# Altium PCB PCB_LC_LPF_T.PcbDoc
Units mm, origin at the board's own origin, x right, y up, seen from the top; angles counter-clockwise.
Board outline 180 x 65 mm, 2 copper layers (Top Layer, Bottom Layer); 100 components, 61 nets, 200 pads, 43 vias.
Unrouted connection lines stored in the file: 5.
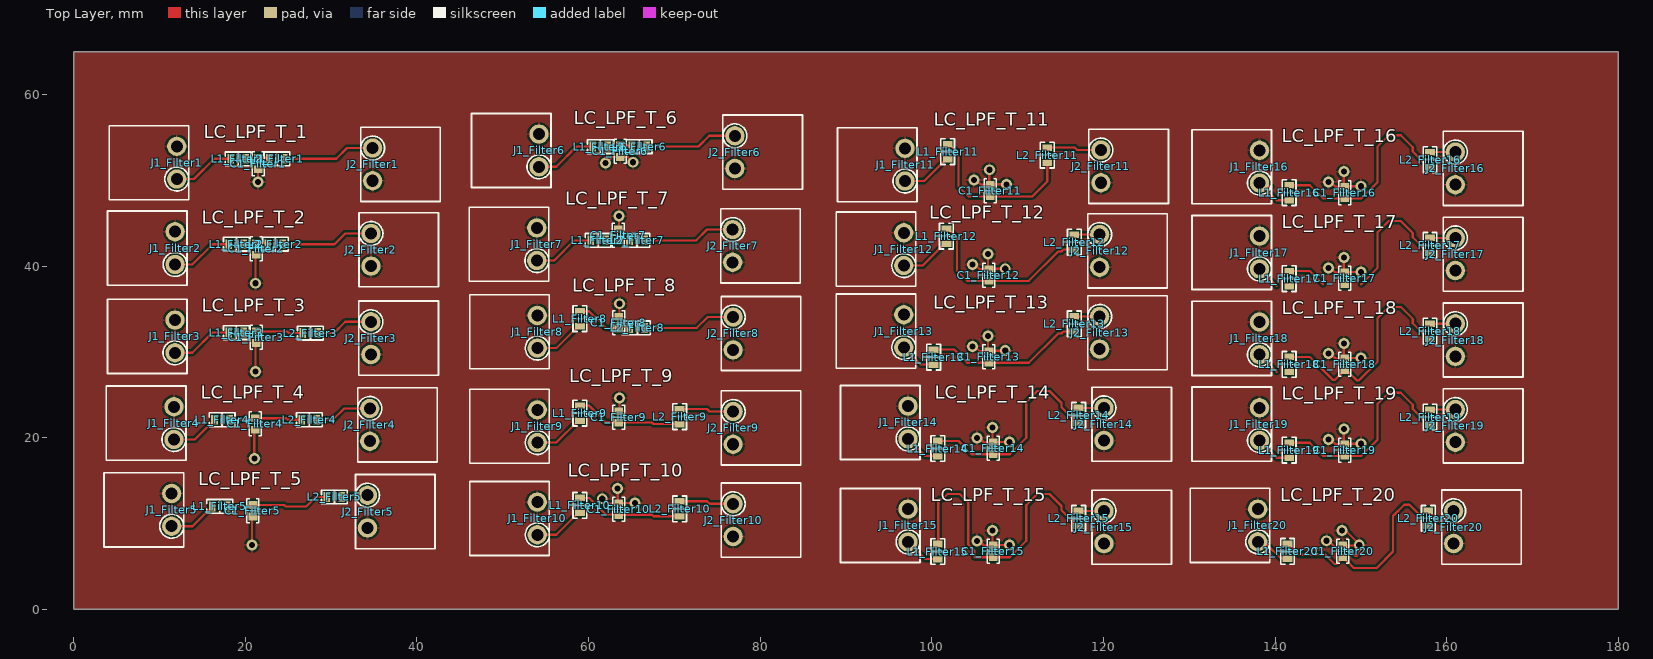
[diagram p0: Top Layer view]
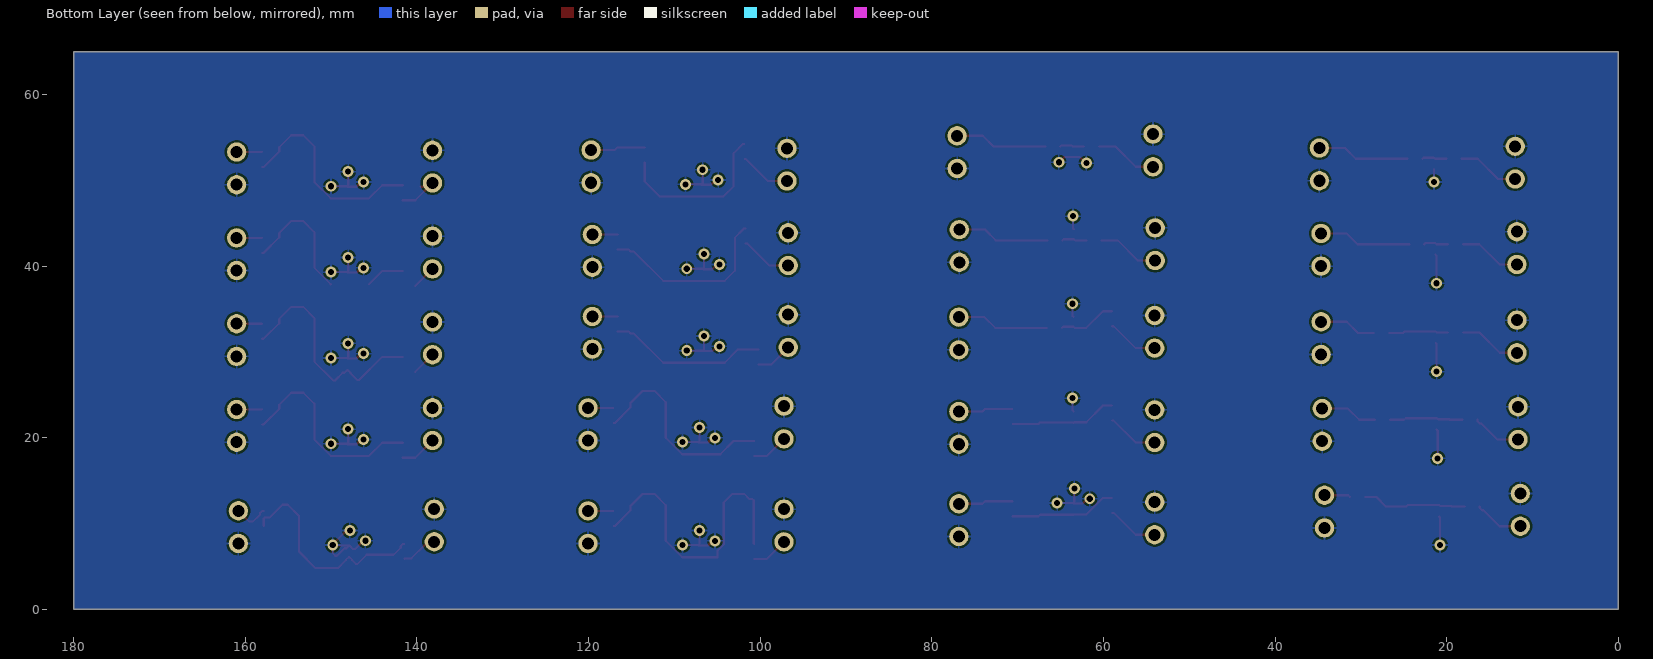
[diagram p1: Bottom Layer view, seen from below]
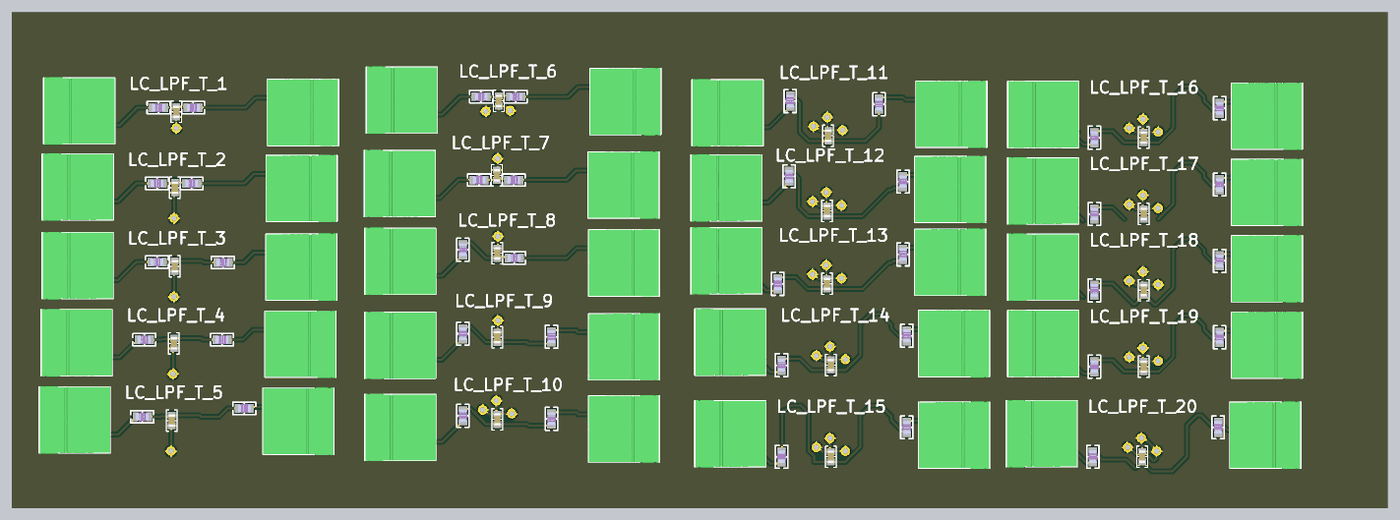
[diagram p2: 3D render of the assembled board from above, using the file's embedded part models]

## Layer stack, top to bottom
Top Solder: solder mask 0.0102, Solder Resist, Dk 3.5
Top Layer: signal copper 0.0356
Dielectric 1: dielectric 0.32, FR-4, Dk 4.8
Bottom Layer: signal copper 0.0356
Bottom Solder: solder mask 0.0102, Solder Resist, Dk 3.5

## Board outline
0,0 180,0 180,65 0,65

## Design rules (kind name [scope] priority, off if disabled: settings)
Clearance [All] p1: gap=0.254 ignorepadtopadclearanceinfootprint=FALSE except(0: Arc-Hole Track-Hole SMDPad-Hole THPad-Hole Via-Hole Fill-Hole Poly-Hole Region-Hole Text-Hole)
PolygonConnect [All] p1: connectstyle=Relief reliefconductorwidth=0.254 reliefentries=4 polygonreliefangle="90 Angle" airgapwidth=0.254
RoomDefinition Filter9 [InComponentClass('Filter9')] p1: confinementstyle=ConfineIn formatcopy=TRUE lockcomponents=TRUE outline 45.805,16.275 80.605,16.275 80.605,26.275 45.805,26.275
RoomDefinition Filter8 [InComponentClass('Filter8')] p2: confinementstyle=ConfineIn formatcopy=TRUE lockcomponents=TRUE outline 45.805,27.275 80.605,27.275 80.605,37.275 45.805,37.275
RoomDefinition Filter7 [InComponentClass('Filter7')] p3: confinementstyle=ConfineIn formatcopy=TRUE lockcomponents=TRUE outline 45.75,37.475 80.55,37.475 80.55,47.475 45.75,47.475
RoomDefinition Filter6 [InComponentClass('Filter6')] p4: confinementstyle=ConfineIn formatcopy=TRUE lockcomponents=TRUE outline 46.005,48.4 80.805,48.4 80.805,58.4 46.005,58.4
RoomDefinition Filter2 [InComponentClass('Filter2')] p5: confinementstyle=ConfineIn formatcopy=TRUE lockcomponents=FALSE outline 3.205,37.027 38.005,37.027 38.005,47.027 3.205,47.027
RoomDefinition Filter3 [InComponentClass('Filter3')] p6: confinementstyle=ConfineIn formatcopy=TRUE lockcomponents=FALSE outline 3.205,26.731 38.005,26.731 38.005,36.731 3.205,36.731
RoomDefinition Filter4 [InComponentClass('Filter4')] p7: confinementstyle=ConfineIn formatcopy=TRUE lockcomponents=FALSE outline 3.205,16.631 38.005,16.631 38.005,26.631 3.205,26.631
RoomDefinition Filter5 [InComponentClass('Filter5')] p8: confinementstyle=ConfineIn formatcopy=TRUE lockcomponents=FALSE outline 3.205,6.527 38.005,6.527 38.005,16.527 3.205,16.527
RoomDefinition Filter10 [InComponentClass('Filter10')] p9: confinementstyle=ConfineIn formatcopy=TRUE lockcomponents=TRUE outline 45.805,5.525 80.605,5.525 80.605,15.525 45.805,15.525
RoomDefinition Filter11 [InComponentClass('Filter11')] p10: confinementstyle=ConfineIn formatcopy=TRUE lockcomponents=FALSE outline 88.647,46.742 123.447,46.742 123.447,56.742 88.647,56.742
RoomDefinition Filter12 [InComponentClass('Filter12')] p11: confinementstyle=ConfineIn formatcopy=TRUE lockcomponents=FALSE outline 88.505,36.9 123.305,36.9 123.305,46.9 88.505,46.9
RoomDefinition Filter13 [InComponentClass('Filter13')] p12: confinementstyle=ConfineIn formatcopy=TRUE lockcomponents=FALSE outline 88.505,27.358 123.305,27.358 123.305,37.358 88.505,37.358
RoomDefinition Filter15 [InComponentClass('Filter15')] p13: confinementstyle=ConfineIn formatcopy=TRUE lockcomponents=FALSE outline 89.005,4.706 123.805,4.706 123.805,14.706 89.005,14.706
RoomDefinition Filter16 [InComponentClass('Filter16')] p14: confinementstyle=ConfineIn formatcopy=TRUE lockcomponents=FALSE outline 129.947,46.511 164.747,46.511 164.747,56.511 129.947,56.511
RoomDefinition Filter17 [InComponentClass('Filter17')] p15: confinementstyle=ConfineIn formatcopy=TRUE lockcomponents=FALSE outline 129.947,36.511 164.747,36.511 164.747,46.511 129.947,46.511
RoomDefinition Filter18 [InComponentClass('Filter18')] p16: confinementstyle=ConfineIn formatcopy=TRUE lockcomponents=FALSE outline 129.947,26.511 164.747,26.511 164.747,36.511 129.947,36.511
RoomDefinition Filter19 [InComponentClass('Filter19')] p17: confinementstyle=ConfineIn formatcopy=TRUE lockcomponents=FALSE outline 129.947,16.511 164.747,16.511 164.747,26.511 129.947,26.511
RoomDefinition Filter20 [InComponentClass('Filter20')] p18: confinementstyle=ConfineIn formatcopy=TRUE lockcomponents=FALSE outline 129.747,4.711 164.547,4.711 164.547,14.711 129.747,14.711
RoomDefinition Filter14 [InComponentClass('Filter14')] p19: confinementstyle=ConfineIn formatcopy=TRUE lockcomponents=FALSE outline 89.005,16.706 123.805,16.706 123.805,26.706 89.005,26.706
RoutingVias [All] p1: holewidth=0.711 width=1.27 viastyle="Through Hole" minholewidth=0.711 minwidth=1.27 maxholewidth=0.711 maxwidth=1.27
SolderMaskExpansion [All] p1: expansion=0.102 istentingtop=FALSE
Width [All] p1: maxlimit=0.254 minlimit=0.254 preferedwidth=0.254
30 further rules are at their usual default settings.

## Classes and differential pairs
channel class PCB_LC_LPF_T: Filter1 Filter2 Filter3 Filter4 Filter5 Filter6 Filter7 Filter8 Filter9 Filter10 Filter11 Filter12 Filter13 Filter14 Filter15 Filter16 Filter17 Filter18 Filter19 Filter20
component class Filter20: C1_Filter20 J1_Filter20 J2_Filter20 L1_Filter20 L2_Filter20
component class Filter19: C1_Filter19 J1_Filter19 J2_Filter19 L1_Filter19 L2_Filter19
component class Filter18: C1_Filter18 J1_Filter18 J2_Filter18 L1_Filter18 L2_Filter18
component class Filter17: C1_Filter17 J1_Filter17 J2_Filter17 L1_Filter17 L2_Filter17
component class Filter16: C1_Filter16 J1_Filter16 J2_Filter16 L1_Filter16 L2_Filter16
component class Filter15: C1_Filter15 J1_Filter15 J2_Filter15 L1_Filter15 L2_Filter15
component class Filter14: C1_Filter14 J1_Filter14 J2_Filter14 L1_Filter14 L2_Filter14
component class Filter13: C1_Filter13 J1_Filter13 J2_Filter13 L1_Filter13 L2_Filter13
component class Filter12: C1_Filter12 J1_Filter12 J2_Filter12 L1_Filter12 L2_Filter12
component class Filter11: C1_Filter11 J1_Filter11 J2_Filter11 L1_Filter11 L2_Filter11
component class Filter10: C1_Filter10 J1_Filter10 J2_Filter10 L1_Filter10 L2_Filter10
component class Filter9: C1_Filter9 J1_Filter9 J2_Filter9 L1_Filter9 L2_Filter9
component class Filter8: C1_Filter8 J1_Filter8 J2_Filter8 L1_Filter8 L2_Filter8
component class Filter7: C1_Filter7 J1_Filter7 J2_Filter7 L1_Filter7 L2_Filter7
component class Filter6: C1_Filter6 J1_Filter6 J2_Filter6 L1_Filter6 L2_Filter6
component class Filter5: C1_Filter5 J1_Filter5 J2_Filter5 L1_Filter5 L2_Filter5
component class Filter4: C1_Filter4 J1_Filter4 J2_Filter4 L1_Filter4 L2_Filter4
component class Filter3: C1_Filter3 J1_Filter3 J2_Filter3 L1_Filter3 L2_Filter3
component class Filter2: C1_Filter2 J1_Filter2 J2_Filter2 L1_Filter2 L2_Filter2
component class Filter1: C1_Filter1 J1_Filter1 J2_Filter1 L1_Filter1 L2_Filter1

## Components (designator, comment, footprint, x,y, rotation, side; value= is the part's Value field where it differs from the comment)
C1_Filter1 "10 µF" "CAP 0603_1608" 21.5,51.95 r90 top (schematic designator C1)
C1_Filter2 "10 µF" "CAP 0603_1608" 21.305,42.002 r90 top (schematic designator C1)
C1_Filter3 "10 µF" "CAP 0603_1608" 21.293,31.706 r90 top (schematic designator C1)
C1_Filter4 "10 µF" "CAP 0603_1608" 21.168,21.606 r90 top (schematic designator C1)
C1_Filter5 "10 µF" "CAP 0603_1608" 20.905,11.502 r90 top (schematic designator C1)
C1_Filter6 "10 µF" "CAP 0603_1608" 63.705,53.375 r90 top (schematic designator C1)
C1_Filter7 "10 µF" "CAP 0603_1608" 63.445,43.617 r270 top (schematic designator C1)
C1_Filter8 "10 µF" "CAP 0603_1608" 63.5,33.417 r270 top (schematic designator C1)
C1_Filter9 "10 µF" "CAP 0603_1608" 63.5,22.417 r270 top (schematic designator C1)
C1_Filter10 "10 µF" "CAP 0603_1608" 63.5,11.667 r270 top (schematic designator C1)
C1_Filter11 "10 µF" "CAP 0603_1608" 106.8,48.8 r270 top (schematic designator C1)
C1_Filter12 "10 µF" "CAP 0603_1608" 106.658,38.958 r270 top (schematic designator C1)
C1_Filter13 "10 µF" "CAP 0603_1608" 106.658,29.416 r270 top (schematic designator C1)
C1_Filter14 "10 µF" "CAP 0603_1608" 107.158,18.764 r270 top (schematic designator C1)
C1_Filter15 "10 µF" "CAP 0603_1608" 107.158,6.764 r270 top (schematic designator C1)
C1_Filter16 "10 µF" "CAP 0603_1608" 148.1,48.569 r270 top (schematic designator C1)
C1_Filter17 "10 µF" "CAP 0603_1608" 148.1,38.569 r270 top (schematic designator C1)
C1_Filter18 "10 µF" "CAP 0603_1608" 148.1,28.569 r270 top (schematic designator C1)
C1_Filter19 "10 µF" "CAP 0603_1608" 148.1,18.569 r270 top (schematic designator C1)
C1_Filter20 "10 µF" "CAP 0603_1608" 147.9,6.769 r270 top (schematic designator C1)
J1_Filter1 "OQ0232510000G" "FCI 06-381-2PIN" 8.726,52.049 r90 top (schematic designator J1)
J1_Filter2 "OQ0232510000G" "FCI 06-381-2PIN" 8.531,42.101 r90 top (schematic designator J1)
J1_Filter3 "OQ0232510000G" "FCI 06-381-2PIN" 8.519,31.805 r90 top (schematic designator J1)
J1_Filter4 "OQ0232510000G" "FCI 06-381-2PIN" 8.394,21.705 r90 top (schematic designator J1)
J1_Filter5 "OQ0232510000G" "FCI 06-381-2PIN" 8.131,11.601 r90 top (schematic designator J1)
J1_Filter6 "OQ0232510000G" "FCI 06-381-2PIN" 50.931,53.474 r90 top (schematic designator J1)
J1_Filter7 "OQ0232510000G" "FCI 06-381-2PIN" 50.676,42.549 r90 top (schematic designator J1)
J1_Filter8 "OQ0232510000G" "FCI 06-381-2PIN" 50.731,32.349 r90 top (schematic designator J1)
J1_Filter9 "OQ0232510000G" "FCI 06-381-2PIN" 50.731,21.349 r90 top (schematic designator J1)
J1_Filter10 "OQ0232510000G" "FCI 06-381-2PIN" 50.731,10.599 r90 top (schematic designator J1)
J1_Filter11 "OQ0232510000G" "FCI 06-381-2PIN" 93.573,51.816 r90 top (schematic designator J1)
J1_Filter12 "OQ0232510000G" "FCI 06-381-2PIN" 93.431,41.974 r90 top (schematic designator J1)
J1_Filter13 "OQ0232510000G" "FCI 06-381-2PIN" 93.431,32.432 r90 top (schematic designator J1)
J1_Filter14 "OQ0232510000G" "FCI 06-381-2PIN" 93.931,21.78 r90 top (schematic designator J1)
J1_Filter15 "OQ0232510000G" "FCI 06-381-2PIN" 93.931,9.78 r90 top (schematic designator J1)
J1_Filter16 "OQ0232510000G" "FCI 06-381-2PIN" 134.873,51.585 r90 top (schematic designator J1)
J1_Filter17 "OQ0232510000G" "FCI 06-381-2PIN" 134.873,41.585 r90 top (schematic designator J1)
J1_Filter18 "OQ0232510000G" "FCI 06-381-2PIN" 134.873,31.585 r90 top (schematic designator J1)
J1_Filter19 "OQ0232510000G" "FCI 06-381-2PIN" 134.873,21.585 r90 top (schematic designator J1)
J1_Filter20 "OQ0232510000G" "FCI 06-381-2PIN" 134.673,9.785 r90 top (schematic designator J1)
J2_Filter1 "OQ0232510000G" "FCI 06-381-2PIN" 38.15,51.85 r270 top (schematic designator J2)
J2_Filter2 "OQ0232510000G" "FCI 06-381-2PIN" 37.955,41.902 r270 top (schematic designator J2)
J2_Filter3 "OQ0232510000G" "FCI 06-381-2PIN" 37.943,31.606 r270 top (schematic designator J2)
J2_Filter4 "OQ0232510000G" "FCI 06-381-2PIN" 37.818,21.506 r270 top (schematic designator J2)
J2_Filter5 "OQ0232510000G" "FCI 06-381-2PIN" 37.555,11.402 r270 top (schematic designator J2)
J2_Filter6 "OQ0232510000G" "FCI 06-381-2PIN" 80.355,53.275 r270 top (schematic designator J2)
J2_Filter7 "OQ0232510000G" "FCI 06-381-2PIN" 80.1,42.35 r270 top (schematic designator J2)
J2_Filter8 "OQ0232510000G" "FCI 06-381-2PIN" 80.155,32.15 r270 top (schematic designator J2)
J2_Filter9 "OQ0232510000G" "FCI 06-381-2PIN" 80.155,21.15 r270 top (schematic designator J2)
J2_Filter10 "OQ0232510000G" "FCI 06-381-2PIN" 80.155,10.4 r270 top (schematic designator J2)
J2_Filter11 "OQ0232510000G" "FCI 06-381-2PIN" 122.997,51.617 r270 top (schematic designator J2)
J2_Filter12 "OQ0232510000G" "FCI 06-381-2PIN" 122.855,41.775 r270 top (schematic designator J2)
J2_Filter13 "OQ0232510000G" "FCI 06-381-2PIN" 122.855,32.233 r270 top (schematic designator J2)
J2_Filter14 "OQ0232510000G" "FCI 06-381-2PIN" 123.355,21.581 r270 top (schematic designator J2)
J2_Filter15 "OQ0232510000G" "FCI 06-381-2PIN" 123.355,9.581 r270 top (schematic designator J2)
J2_Filter16 "OQ0232510000G" "FCI 06-381-2PIN" 164.297,51.386 r270 top (schematic designator J2)
J2_Filter17 "OQ0232510000G" "FCI 06-381-2PIN" 164.297,41.386 r270 top (schematic designator J2)
J2_Filter18 "OQ0232510000G" "FCI 06-381-2PIN" 164.297,31.386 r270 top (schematic designator J2)
J2_Filter19 "OQ0232510000G" "FCI 06-381-2PIN" 164.297,21.386 r270 top (schematic designator J2)
J2_Filter20 "OQ0232510000G" "FCI 06-381-2PIN" 164.097,9.586 r270 top (schematic designator J2)
L1_Filter1 "47µH" "IND 0603_1608 RF WW" 19.175,52.5 r180 top (schematic designator L1)
L1_Filter2 "47µH" "IND 0603_1608 RF WW" 18.98,42.552 r180 top (schematic designator L1)
L1_Filter3 "47µH" "IND 0603_1608 RF WW" 18.968,32.256 r180 top (schematic designator L1)
L1_Filter4 "47µH" "IND 0603_1608 RF WW" 17.3,22.1 r180 top (schematic designator L1)
L1_Filter5 "47µH" "IND 0603_1608 RF WW" 17.037,11.996 r180 top (schematic designator L1)
L1_Filter6 "47µH" "IND 0603_1608 RF WW" 61.38,53.925 r180 top (schematic designator L1)
L1_Filter7 "47µH" "IND 0603_1608 RF WW" 61.125,43 r180 top (schematic designator L1)
L1_Filter8 "47µH" "IND 0603_1608 RF WW" 59,33.875 r270 top (schematic designator L1)
L1_Filter9 "47µH" "IND 0603_1608 RF WW" 59,22.875 r270 top (schematic designator L1)
L1_Filter10 "47µH" "IND 0603_1608 RF WW" 59,12.125 r270 top (schematic designator L1)
L1_Filter11 "47µH" "IND 0603_1608 RF WW" 101.842,53.342 r270 top (schematic designator L1)
L1_Filter12 "47µH" "IND 0603_1608 RF WW" 101.7,43.5 r270 top (schematic designator L1)
L1_Filter13 "47µH" "IND 0603_1608 RF WW" 100.2,29.4 r270 top (schematic designator L1)
L1_Filter14 "47µH" "IND 0603_1608 RF WW" 100.7,18.748 r270 top (schematic designator L1)
L1_Filter15 "47µH" "IND 0603_1608 RF WW" 100.7,6.748 r270 top (schematic designator L1)
L1_Filter16 "47µH" "IND 0603_1608 RF WW" 141.642,48.553 r270 top (schematic designator L1)
L1_Filter17 "47µH" "IND 0603_1608 RF WW" 141.642,38.553 r270 top (schematic designator L1)
L1_Filter18 "47µH" "IND 0603_1608 RF WW" 141.642,28.553 r270 top (schematic designator L1)
L1_Filter19 "47µH" "IND 0603_1608 RF WW" 141.642,18.553 r270 top (schematic designator L1)
L1_Filter20 "47µH" "IND 0603_1608 RF WW" 141.442,6.753 r270 top (schematic designator L1)
L2_Filter1 "47µH" "IND 0603_1608 RF WW" 23.7,52.5 r180 top (schematic designator L2)
L2_Filter2 "47µH" "IND 0603_1608 RF WW" 23.505,42.552 r180 top (schematic designator L2)
L2_Filter3 "47µH" "IND 0603_1608 RF WW" 27.6,32.2 r180 top (schematic designator L2)
L2_Filter4 "47µH" "IND 0603_1608 RF WW" 27.475,22.1 r180 top (schematic designator L2)
L2_Filter5 "47µH" "IND 0603_1608 RF WW" 30.4,13.1 r180 top (schematic designator L2)
L2_Filter6 "47µH" "IND 0603_1608 RF WW" 65.905,53.925 r180 top (schematic designator L2)
L2_Filter7 "47µH" "IND 0603_1608 RF WW" 65.65,43 r180 top (schematic designator L2)
L2_Filter8 "47µH" "IND 0603_1608 RF WW" 65.705,32.8 r180 top (schematic designator L2)
L2_Filter9 "47µH" "IND 0603_1608 RF WW" 70.605,22.475 r270 top (schematic designator L2)
L2_Filter10 "47µH" "IND 0603_1608 RF WW" 70.605,11.725 r270 top (schematic designator L2)
L2_Filter11 "47µH" "IND 0603_1608 RF WW" 113.447,52.942 r270 top (schematic designator L2)
L2_Filter12 "47µH" "IND 0603_1608 RF WW" 116.6,42.8 r270 top (schematic designator L2)
L2_Filter13 "47µH" "IND 0603_1608 RF WW" 116.6,33.258 r270 top (schematic designator L2)
L2_Filter14 "47µH" "IND 0603_1608 RF WW" 117.1,22.606 r270 top (schematic designator L2)
L2_Filter15 "47µH" "IND 0603_1608 RF WW" 117.1,10.606 r270 top (schematic designator L2)
L2_Filter16 "47µH" "IND 0603_1608 RF WW" 158.042,52.411 r270 top (schematic designator L2)
L2_Filter17 "47µH" "IND 0603_1608 RF WW" 158.042,42.411 r270 top (schematic designator L2)
L2_Filter18 "47µH" "IND 0603_1608 RF WW" 158.042,32.411 r270 top (schematic designator L2)
L2_Filter19 "47µH" "IND 0603_1608 RF WW" 158.042,22.411 r270 top (schematic designator L2)
L2_Filter20 "47µH" "IND 0603_1608 RF WW" 157.842,10.611 r270 top (schematic designator L2)

## Footprints (in the part's own frame and the unit in brackets; to place one, negate y for a bottom-side part, rotate by r counter-clockwise, add the part's x,y. Pads: shape width x height; smd on the part's side, far side on the other; paste and mask are expansions set on the pad)
"CAP 0603_1608" [mm] "Chip Capacitor, 2-Leads, Body 1.60x0.80mm, IPC Medium Density"
  rect 0.9x1 smd: 1(-0.675,0) 2(0.675,0)
  silkscreen extent -1.4,-0.7 1.4,0.7, body extent -0.8,-0.41 0.8,0.41, height 0.82
"FCI 06-381-2PIN" [mm] "FCI Pluggable Terminal Block"
  round 2.25 hole 1.4: 1(-1.905,-3.302) 2(1.905,-3.302)
  silkscreen extent -4.32,-4.7 4.32,4.57, body extent -4.4,-4.7 4.4,4.5, height 7.6
"IND 0603_1608 RF WW" [mm] "Chip Inductor, 2-Leads, Body 1.65x0.99mm, IPC Medium Density"
  rect 0.76x1.13 smd: 1(-0.875,0) 2(0.875,0)
  silkscreen extent -1.5,-0.8 1.5,0.8, body extent -0.84,-0.58 0.83,0.58, height 1

## Part data
C1_Filter1 C1_Filter2 C1_Filter3 C1_Filter4 C1_Filter5 C1_Filter6 C1_Filter7 C1_Filter8 C1_Filter9 C1_Filter10 C1_Filter11 C1_Filter12 C1_Filter13 C1_Filter14 C1_Filter15 C1_Filter16 C1_Filter17 C1_Filter18 C1_Filter19 C1_Filter20: library part MD0603BW106M100NHT-EM, "CAP CER 10UF 10V X5R 0603", Device Package="0603 (1608 Metric)", manufacturer="Knowles Novacap", Operating Temperature="-55°C ~ 85°C", Supplier Part Number 1=1763-MD0603BW106M100NHT-EMCT-ND, Temperature Coefficient=X5R, Tolerance=±20%, Voltage - Rated=10V, Applications="Medical, Non-Critical", Capacitance="10 µF", componentlink1description=Datasheet, componentlink1url="https://mm.digikey.com/Volume0/opasdata/d220001/medias/docus/5546/MD Series R3.pdf", componentlink2description="DigiKey Link", componentlink2url=https://www.digikey.com/en/products/detail/knowles-novacap/MD0603BW106M100NHT-EM/21406876, lastupdated="02/11/2023 19:09:18", Lifecycle Status=Active, Minimum Order=1, Mounting Type="Surface Mount, MLCC", Package / Case="0603 (1608 Metric)", packaging=TapeAndReel, Part Number=MD0603BW106M100NHT-EM, partid=56748, price=0.24, series=MD, Supplier 1=DigiKey
J1_Filter1 J1_Filter2 J1_Filter3 J1_Filter4 J1_Filter5 J1_Filter6 J1_Filter7 J1_Filter8 J1_Filter9 J1_Filter10 J1_Filter11 J1_Filter12 J1_Filter13 J1_Filter14 J1_Filter15 J1_Filter16 J1_Filter17 J1_Filter18 J1_Filter19 J1_Filter20 J2_Filter1 J2_Filter2 J2_Filter3 J2_Filter4 J2_Filter5 J2_Filter6 J2_Filter7 J2_Filter8 J2_Filter9 J2_Filter10 J2_Filter11 J2_Filter12 J2_Filter13 J2_Filter14 J2_Filter15 J2_Filter16 J2_Filter17 J2_Filter18 J2_Filter19 J2_Filter20: "TERM BLOCK HDR 2POS 90DEG 3.81MM", Color=Green, Current - UL=10A, manufacturer="Amphenol Anytek", Operating Temperature="-40°C ~ 115°C", Supplier Part Number 1=609-3819-ND, Voltage - UL=300V, componentlink1description=Datasheet, componentlink1url=http://portal.fciconnect.com/Comergent//fci/drawing/oqxx32x100j0g.pdf, componentlink2description="DigiKey Link", componentlink2url=//digikey.com/product-detail/en/amphenol-anytek/OQ0232510000G/609-3819-ND/2261255, Contact Mating Finish=Tin, Header Orientation="90°, Right Angle", lastupdated="16/12/2019 19:14:30", Lifecycle Status=0, Minimum Order=1, Mounting Type="Through Hole", Number of Levels=1, Number of Positions=2, packaging=Bulk, Part Number=OQ0232510000G, Part Status=Active, Pitch="0.150\" (3.81mm)", Positions Per Level=2, price=0.49, series=06-381, Supplier 1=DigiKey, Termination Style=Solder, Type="Header, Male Pins, Shrouded (4 Side)"
L1_Filter1 L1_Filter2 L1_Filter3 L1_Filter4 L1_Filter5 L1_Filter6 L1_Filter7 L1_Filter8 L1_Filter9 L1_Filter10 L1_Filter11 L1_Filter12 L1_Filter13 L1_Filter14 L1_Filter15 L1_Filter16 L1_Filter17 L1_Filter18 L1_Filter19 L1_Filter20 L2_Filter1 L2_Filter2 L2_Filter3 L2_Filter4 L2_Filter5 L2_Filter6 L2_Filter7 L2_Filter8 L2_Filter9 L2_Filter10 L2_Filter11 L2_Filter12 L2_Filter13 L2_Filter14 L2_Filter15 L2_Filter16 L2_Filter17 L2_Filter18 L2_Filter19 L2_Filter20: library part L0603B470MPWFT, "INDUCTORPOWER LINE 0603 47H 20%", Current Rating (Amps)=90mA, DC Resistance (DCR)=5.8Ohm, Device Package="0603 (1608 Metric)", Frequency - Self Resonant=11MHz, Inductance Frequency - Test=2.52MHz, manufacturer=KEMET, Operating Temperature="-40°C ~ 105°C", Supplier Part Number 1=399-17776-1-ND, Tolerance=±20%, componentlink1description=Datasheet, componentlink1url=https://api.kemet.com/component-edge/download/datasheet/L0603B470MPWFT.pdf, componentlink2description="DigiKey Link", componentlink2url=http://digikey.com/product-detail/en/kemet/L0603B470MPWFT/399-17776-1-ND/8601439, Height - Seated (Max)="0.035\" (0.90mm)", Inductance=47µH, lastupdated="06/09/2020 11:05:20", Lifecycle Status=Active, Material - Core=Ferrite, Minimum Order=1, Mounting Type="Surface Mount", Package / Case="0603 (1608 Metric)", packaging=TapeAndReel, Part Number=L0603B470MPWFT, Part Status=Active, partid=1309, price=0.14, series=L-PWF, Shielding=Unshielded, Size / Dimension="0.063\" L x 0.031\" W (1.60mm x 0.80mm)", Supplier 1=DigiKey, Supplier Device Package="0603 (1608 Metric)", Type=Wirewound

## Via types
v1: diameter 1.27, hole 0.711, Top Layer to Bottom Layer, 43 vias

## Nets (pads, with @x,y where several pads share a name; then routed paths per layer and width w, separated by ;. In a path a pad name is that pad's centre, name@x,y a point inside that pad or via, vN(x,y) a via of type N, cw(c..) or ccw(c..) an arc to the next point about the centre after c; other vN are vias at no path point)
GND: C1_Filter1.1 C1_Filter2.1 C1_Filter3.1 C1_Filter4.1 C1_Filter5.1 C1_Filter6.1 C1_Filter7.1 C1_Filter8.1 C1_Filter9.1 C1_Filter10.1 C1_Filter11.1 C1_Filter12.1 C1_Filter13.1 C1_Filter14.1 C1_Filter15.1 C1_Filter16.1 C1_Filter17.1 C1_Filter18.1 C1_Filter19.1 C1_Filter20.1 J1_Filter1.2 J1_Filter2.2 J1_Filter3.2 J1_Filter4.2 J1_Filter5.2 J1_Filter6.2 J1_Filter7.2 J1_Filter8.2 J1_Filter9.2 J1_Filter10.2 J1_Filter11.2 J1_Filter12.2 J1_Filter13.2 J1_Filter14.2 J1_Filter15.2 J1_Filter16.2 J1_Filter17.2 J1_Filter18.2 J1_Filter19.2 J1_Filter20.2 J2_Filter1.2 J2_Filter2.2 J2_Filter3.2 J2_Filter4.2 J2_Filter5.2 J2_Filter6.2 J2_Filter7.2 J2_Filter8.2 J2_Filter9.2 J2_Filter10.2 J2_Filter11.2 J2_Filter12.2 J2_Filter13.2 J2_Filter14.2 J2_Filter15.2 J2_Filter16.2 J2_Filter17.2 J2_Filter18.2 J2_Filter19.2 J2_Filter20.2 | length 93.2
  Top Layer w0.254: v1(20.8,7.5) 20.8,10.722 C1_Filter5.1 ; v1(21.063,17.604) 21.063,20.826 C1_Filter4.1 ; v1(21.188,27.704) 21.188,30.926 C1_Filter3.1 ; v1(21.2,38) 21.2,41.222 C1_Filter2.1 ; v1(21.5,49.8) C1_Filter1.1 ; v1(61.6,12.898) 61.875,12.898 62.431,12.342 C1_Filter10.1 ; v1(62,52) 62.037,52 62.737,52.7 C1_Filter6.1 64.586,52.7 65.186,52.1 v1(65.2,52.1) ; v1(63.4,14.098) 63.4,12.442 C1_Filter10.1 ; C1_Filter7.1 63.545,44.392 v1(63.545,45.817) ; C1_Filter9.1 63.6,23.192 v1(63.6,24.617) ; C1_Filter8.1 63.6,34.192 v1(63.6,35.617) ; v1(65.4,12.398) 63.556,12.398 C1_Filter10.1 ; v1(104.758,30.647) 105.033,30.647 105.589,30.091 C1_Filter13.1 ; v1(104.758,40.189) 105.033,40.189 105.589,39.633 C1_Filter12.1 ; v1(104.9,50.031) 105.175,50.031 105.731,49.475 C1_Filter11.1 ; v1(105.258,7.995) 105.533,7.995 106.089,7.439 C1_Filter15.1 ; v1(105.258,19.995) 105.533,19.995 106.089,19.439 C1_Filter14.1 ; C1_Filter13.1@106.558,30.091 C1_Filter13.1 ; v1(106.558,31.847) 106.558,30.191 C1_Filter13.1 ; C1_Filter12.1@106.558,39.633 C1_Filter12.1 ; v1(106.558,41.389) 106.558,39.733 C1_Filter12.1 ; C1_Filter11.1@106.7,49.475 C1_Filter11.1 ; v1(106.7,51.231) 106.7,49.575 C1_Filter11.1 ; C1_Filter15.1@107.058,7.439 C1_Filter15.1 ; v1(107.058,9.195) 107.058,7.539 C1_Filter15.1 ; C1_Filter14.1@107.058,19.439 C1_Filter14.1 ; v1(107.058,21.195) 107.058,19.539 C1_Filter14.1 ; v1(108.558,30.147) 106.714,30.147 C1_Filter13.1 ; v1(108.558,39.689) 106.714,39.689 C1_Filter12.1 ; v1(108.7,49.531) 106.856,49.531 C1_Filter11.1 ; v1(109.058,7.495) 107.214,7.495 C1_Filter15.1 ; v1(109.058,19.495) 107.214,19.495 C1_Filter14.1 ; v1(146,8) 146.214,8 147.168,7.046 147.452,7.046 147.85,7.444 C1_Filter20.1 148.223,7.121 148.437,7.121 149.295,6.263 149.506,6.263 149.8,6.557 v1(149.8,7.5) ; v1(146.2,19.8) 146.475,19.8 147.031,19.244 C1_Filter19.1 ; v1(146.2,29.8) 146.475,29.8 147.031,29.244 C1_Filter18.1 ; v1(146.2,39.8) 146.475,39.8 147.031,39.244 C1_Filter17.1 ; v1(146.2,49.8) 146.475,49.8 147.031,49.244 C1_Filter16.1 ; v1(147.8,9.2) 147.994,9.006 148.4,9.006 149.799,7.607 149.799,7.547 149.696,7.444 C1_Filter20.1@148.114,7.444 ; C1_Filter19.1@148,19.244 C1_Filter19.1 ; v1(148,21) 148,19.344 C1_Filter19.1 ; C1_Filter18.1@148,29.244 C1_Filter18.1 ; v1(148,31) 148,29.344 C1_Filter18.1 ; C1_Filter17.1@148,39.244 C1_Filter17.1 ; v1(148,41) 148,39.344 C1_Filter17.1 ; C1_Filter16.1@148,49.244 C1_Filter16.1 ; v1(148,51) 148,49.344 C1_Filter16.1 ; v1(150,19.3) 148.156,19.3 C1_Filter19.1 ; v1(150,29.3) 148.156,29.3 C1_Filter18.1 ; v1(150,39.3) 148.156,39.3 C1_Filter17.1 ; v1(150,49.3) 148.156,49.3 C1_Filter16.1
IN_Filter1: J1_Filter1.1 L1_Filter1.2 | length 7.2
  Top Layer w0.254: J1_Filter1.1 14.044,50.144 16.4,52.5 L1_Filter1.2
IN_Filter2: J1_Filter2.1 L1_Filter2.2 | length 7.2
  Top Layer w0.254: J1_Filter2.1 13.849,40.196 16.205,42.552 L1_Filter2.2
IN_Filter3: J1_Filter3.1 L1_Filter3.2 | length 7.2
  Top Layer w0.254: J1_Filter3.1 13.837,29.9 16.193,32.256 L1_Filter3.2
IN_Filter4: J1_Filter4.1 L1_Filter4.2 | length 5.8
  Top Layer w0.254: J1_Filter4.1 14.125,19.8 15.987,21.662 16.172,21.662 16.425,21.915 L1_Filter4.2
IN_Filter5: J1_Filter5.1 L1_Filter5.2 | length 5.8
  Top Layer w0.254: J1_Filter5.1 13.862,9.696 15.724,11.558 15.909,11.558 16.162,11.811 L1_Filter5.2
IN_Filter6: J1_Filter6.1 L1_Filter6.2 | length 7.2
  Top Layer w0.254: J1_Filter6.1 56.249,51.569 58.605,53.925 L1_Filter6.2
IN_Filter7: J1_Filter7.1 L1_Filter7.2 | length 7.2
  Top Layer w0.254: J1_Filter7.1 55.994,40.644 58.35,43 L1_Filter7.2
IN_Filter8: J1_Filter8.1 L1_Filter8.2 | length 6
  Top Layer w0.254: J1_Filter8.1 56.259,30.444 58.815,33 L1_Filter8.2
IN_Filter9: J1_Filter9.1 L1_Filter9.2 | length 6
  Top Layer w0.254: J1_Filter9.1 56.259,19.444 58.815,22 L1_Filter9.2
IN_Filter10: J1_Filter10.1 L1_Filter10.2 | length 6
  Top Layer w0.254: J1_Filter10.1 56.259,8.694 58.815,11.25 L1_Filter10.2
IN_Filter11: J1_Filter11.1 L1_Filter11.2 | length 6
  Top Layer w0.254: J1_Filter11.1 99.101,49.911 101.657,52.467 L1_Filter11.2
IN_Filter12: J1_Filter12.1 L1_Filter12.2 | length 6
  Top Layer w0.254: J1_Filter12.1 98.959,40.069 101.515,42.625 L1_Filter12.2
IN_Filter13: J1_Filter13.1 L1_Filter13.2 | length 4.3
  Top Layer w0.254: J1_Filter13.1 98.735,28.525 L1_Filter13.2
IN_Filter14: J1_Filter14.1 L1_Filter14.2 | length 4.3
  Top Layer w0.254: J1_Filter14.1 99.235,17.873 L1_Filter14.2
IN_Filter15: J1_Filter15.1 L1_Filter15.2 | length 4.3
  Top Layer w0.254: J1_Filter15.1 99.235,5.873 L1_Filter15.2
IN_Filter16: J1_Filter16.1 L1_Filter16.2 | length 4.3
  Top Layer w0.254: J1_Filter16.1 140.177,47.678 L1_Filter16.2
IN_Filter17: J1_Filter17.1 L1_Filter17.2 | length 2.8
  Top Layer w0.254: J1_Filter17.1 140.177,37.678
IN_Filter18: J1_Filter18.1 L1_Filter18.2 | length 4.3
  Top Layer w0.254: 138.077,49.253 139.542,49.253 ; J1_Filter18.1 140.177,27.678
IN_Filter19: J1_Filter19.1 L1_Filter19.2 | length 4.3
  Top Layer w0.254: J1_Filter19.1 140.177,17.678 L1_Filter19.2
IN_Filter20: J1_Filter20.1 L1_Filter20.2 | length 4.3
  Top Layer w0.254: J1_Filter20.1 138.357,7.498 139.093,7.498 140.645,5.947 141.373,5.947 L1_Filter20.2
NetC1_Filter1_2: C1_Filter1.2 L1_Filter1.1 L2_Filter1.2 | length 2.9
  Top Layer w0.254: L1_Filter1.1 21.375,52.5 C1_Filter1.2 22.7,52.625 L2_Filter1.2
NetC1_Filter2_2: C1_Filter2.2 L1_Filter2.1 L2_Filter2.2 | length 2.9
  Top Layer w0.254: L1_Filter2.1 21.18,42.552 C1_Filter2.2 22.505,42.677 L2_Filter2.2
NetC1_Filter3_2: C1_Filter3.2 L1_Filter3.1 L2_Filter3.2 | length 7
  Top Layer w0.254: L1_Filter3.1 21.168,32.256 C1_Filter3.2 24.919,32.381 25.1,32.2 L2_Filter3.2
NetC1_Filter4_2: C1_Filter4.2 L1_Filter4.1 L2_Filter4.2 | length 8.6
  Top Layer w0.254: L1_Filter4.1 19.662,22.1 19.718,22.156 21.043,22.156 C1_Filter4.2 24.794,22.281 24.975,22.1 L2_Filter4.2
NetC1_Filter5_2: C1_Filter5.2 L1_Filter5.1 L2_Filter5.2 | length 12.2
  Top Layer w0.254: L1_Filter5.1 19.399,11.996 19.455,12.052 20.78,12.052 C1_Filter5.2 24.531,12.177 24.712,11.996 27.096,11.996 28.2,13.1 L2_Filter5.2
NetC1_Filter6_2: C1_Filter6.2 L1_Filter6.1 L2_Filter6.2 | length 2.9
  Top Layer w0.254: L1_Filter6.1 63.58,53.925 C1_Filter6.2 64.905,54.05 L2_Filter6.2
NetC1_Filter7_2: C1_Filter7.2 L1_Filter7.1 L2_Filter7.2 | length 2.9
  Top Layer w0.254: L1_Filter7.1 63.325,43 63.45,43.125 64.65,43.125 L2_Filter7.2
NetC1_Filter8_2: C1_Filter8.2 L1_Filter8.1 L2_Filter8.2 | length 6.7
  Top Layer w0.254: L1_Filter8.1 60.05,34.75 62,32.8 63.38,32.8 63.505,32.925 64.705,32.925 L2_Filter8.2
NetC1_Filter9_2: C1_Filter9.2 L1_Filter9.1 L2_Filter9.2 | length 12.4
  Top Layer w0.254: L1_Filter9.1 60.05,23.75 62,21.8 C1_Filter9.2@63.38,21.8 ; C1_Filter9.2 63.533,21.775 67.405,21.775 67.58,21.6 L2_Filter9.2
NetC1_Filter10_2: C1_Filter10.2 L1_Filter10.1 L2_Filter10.2 | length 12.4
  Top Layer w0.254: L1_Filter10.1 60.05,13 62,11.05 C1_Filter10.2@63.38,11.05 ; C1_Filter10.2 63.533,11.025 67.405,11.025 67.58,10.85 L2_Filter10.2
NetC1_Filter11_2: C1_Filter11.2 L1_Filter11.1 L2_Filter11.2 | length 19.3
  Top Layer w0.254: L1_Filter11.1 102.027,54.217 103.09,53.154 103.09,49.31 104.275,48.125 C1_Filter11.2 111.725,48.125 113.447,49.847 L2_Filter11.2
NetC1_Filter12_2: C1_Filter12.2 L1_Filter12.1 L2_Filter12.2 | length 21.2
  Top Layer w0.254: L1_Filter12.1 101.885,44.375 102.948,43.312 102.948,39.468 104.133,38.283 C1_Filter12.2 111.3,38.283 114.717,41.7 115.1,41.7 115.325,41.925 L2_Filter12.2
NetC1_Filter13_2: C1_Filter13.2 L1_Filter13.1 L2_Filter13.2 | length 18.5
  Top Layer w0.254: L1_Filter13.1 102.599,30.275 104.133,28.741 C1_Filter13.2 111.3,28.741 114.717,32.158 115.1,32.158 115.325,32.383 L2_Filter13.2
NetC1_Filter14_2: C1_Filter14.2 L1_Filter14.1 L2_Filter14.2 | length 24.3
  Top Layer w0.254: L1_Filter14.1 103.099,19.623 104.633,18.089 C1_Filter14.2 109.089,18.089 111,20 111,24.148 112.3,25.448 113.7,25.448 115.1,24.048 115.1,23.546 116.915,21.731 L2_Filter14.2
NetC1_Filter15_2: C1_Filter15.2 L1_Filter15.1 L2_Filter15.2 | length 35.4
  Top Layer w0.254: L1_Filter15.1 100.758,7.681 100.758,12.715 100.907,12.864 101.258,12.864 101.858,13.464 103.226,13.464 104.242,12.448 104.242,7.574 104.958,6.858 104.958,6.089 C1_Filter15.2 109.089,6.089 111,8 111,12.148 112.3,13.448 113.7,13.448 115.1,12.048 115.1,11.546 116.915,9.731 L2_Filter15.2
NetC1_Filter16_2: C1_Filter16.2 L1_Filter16.1 L2_Filter16.2 | length 24.3
  Top Layer w0.254: L1_Filter16.1 144.041,49.428 145.575,47.894 C1_Filter16.2 150.031,47.894 151.942,49.805 151.942,53.953 153.242,55.253 154.642,55.253 156.042,53.853 156.042,53.351 157.857,51.536 L2_Filter16.2
NetC1_Filter17_2: C1_Filter17.2 L1_Filter17.1 L2_Filter17.2 | length 19.9
  Top Layer w0.254: L1_Filter17.1 144.041,39.428 145.575,37.894 ; 150.031,37.894 151.942,39.805 151.942,43.953 153.242,45.253 154.642,45.253 156.042,43.853 156.042,43.351 157.857,41.536 L2_Filter17.2
NetC1_Filter18_2: C1_Filter18.2 L1_Filter18.1 L2_Filter18.2 | length 26.9
  Top Layer w0.254: L1_Filter18.1 144.041,29.428 146.732,26.737 146.943,26.737 147.727,27.521 147.727,27.571 148.05,27.894 C1_Filter18.2 148.423,27.571 148.637,27.571 149.539,26.669 149.749,26.669 151.942,28.862 151.942,33.953 153.242,35.253 154.642,35.253 156.042,33.853 156.042,33.351 157.857,31.536 L2_Filter18.2
NetC1_Filter19_2: C1_Filter19.2 L1_Filter19.1 L2_Filter19.2 | length 24.3
  Top Layer w0.254: L1_Filter19.1 144.041,19.428 145.575,17.894 C1_Filter19.2 150.031,17.894 151.942,19.805 151.942,23.953 153.242,25.253 154.642,25.253 156.042,23.853 156.042,23.351 157.857,21.536 L2_Filter19.2
NetC1_Filter20_2: C1_Filter20.2 L1_Filter20.1 L2_Filter20.2 | length 25.4
  Top Layer w0.254: L1_Filter20.1 141.627,7.628 141.88,7.375 141.88,7.19 142.704,6.365 145.84,6.365 146.9,5.305 147.111,5.305 147.527,5.721 147.527,5.771 147.85,6.094 147.95,6.094 148.273,5.771 148.273,5.721 149.162,4.832 151.83,4.832 153.741,6.743 153.741,10.891 155.041,12.191 155.654,12.191 157.119,10.725 157.692,10.725 157.841,10.576 157.841,9.737 L2_Filter20.2
OUT_Filter1: J2_Filter1.1 L2_Filter1.1 | length 10.8
  Top Layer w0.254: L2_Filter1.1 30.6,52.5 31.855,53.755 J2_Filter1.1
OUT_Filter2: J2_Filter2.1 L2_Filter2.1 | length 10.8
  Top Layer w0.254: L2_Filter2.1 30.405,42.552 31.66,43.807 J2_Filter2.1
OUT_Filter3: J2_Filter3.1 L2_Filter3.1 | length 6.7
  Top Layer w0.254: L2_Filter3.1 30.337,32.2 31.648,33.511 J2_Filter3.1
OUT_Filter4: J2_Filter4.1 L2_Filter4.1 | length 6.7
  Top Layer w0.254: L2_Filter4.1 30.212,22.1 31.523,23.411 J2_Filter4.1
OUT_Filter5: J2_Filter5.1 L2_Filter5.1 | length 3.1
  Top Layer w0.254: L2_Filter5.1 31.482,13.307 J2_Filter5.1
OUT_Filter6: J2_Filter6.1 L2_Filter6.1 | length 10.8
  Top Layer w0.254: L2_Filter6.1 72.805,53.925 74.06,55.18 J2_Filter6.1
OUT_Filter7: J2_Filter7.1 L2_Filter7.1 | length 10.8
  Top Layer w0.254: L2_Filter7.1 72.55,43 73.805,44.255 J2_Filter7.1
OUT_Filter8: J2_Filter8.1 L2_Filter8.1 | length 10.8
  Top Layer w0.254: L2_Filter8.1 72.605,32.8 73.86,34.055 J2_Filter8.1
OUT_Filter9: J2_Filter9.1 L2_Filter9.1 | length 6.4
  Top Layer w0.254: L2_Filter9.1 73.81,23.35 74.105,23.055 J2_Filter9.1
OUT_Filter10: J2_Filter10.1 L2_Filter10.1 | length 6.4
  Top Layer w0.254: L2_Filter10.1 73.81,12.6 74.105,12.305 J2_Filter10.1
OUT_Filter11: J2_Filter11.1 L2_Filter11.1 | length 6.4
  Top Layer w0.254: L2_Filter11.1 116.652,53.817 116.947,53.522 J2_Filter11.1
OUT_Filter12: J2_Filter12.1 L2_Filter12.1 | length 3
  Top Layer w0.254: L2_Filter12.1 116.602,43.677 119.55,43.677 J2_Filter12.1
OUT_Filter13: J2_Filter13.1 L2_Filter13.1 | length 3
  Top Layer w0.254: L2_Filter13.1 116.602,34.136 119.55,34.136 J2_Filter13.1
OUT_Filter14: J2_Filter14.1 L2_Filter14.1 | length 3
  Top Layer w0.254: L2_Filter14.1 117.103,23.483 120.05,23.483 J2_Filter14.1
OUT_Filter15: J2_Filter15.1 L2_Filter15.1 | length 3
  Top Layer w0.254: L2_Filter15.1 117.103,11.483 120.05,11.483 J2_Filter15.1
OUT_Filter16: J2_Filter16.1 L2_Filter16.1 | length 3
  Top Layer w0.254: L2_Filter16.1 158.044,53.289 160.992,53.289 J2_Filter16.1
OUT_Filter17: J2_Filter17.1 L2_Filter17.1 | length 3
  Top Layer w0.254: L2_Filter17.1 158.044,43.289 160.992,43.289 J2_Filter17.1
OUT_Filter18: J2_Filter18.1 L2_Filter18.1 | length 3
  Top Layer w0.254: L2_Filter18.1 158.044,33.289 160.992,33.289 J2_Filter18.1
OUT_Filter19: J2_Filter19.1 L2_Filter19.1 | length 3
  Top Layer w0.254: L2_Filter19.1 158.044,23.289 160.992,23.289 J2_Filter19.1
OUT_Filter20: J2_Filter20.1 L2_Filter20.1 | length 4.1
  Top Layer w0.254: L2_Filter20.1 158.027,11.486 158.28,11.233 158.28,11.048 159.102,10.226 159.53,10.226 J2_Filter20.1

## Polygon pours and split planes (outlines as drawn)
GND on Top Layer "TOP_GND" (solid, pour order 0): 0,0 180,0 180,65 0,65
GND on Bottom Layer "BOT_GND" (solid, pour order 1): 0,0 180,0 180,65 0,65

## Silkscreen, mask and mechanical layers (free items; w line width, h text height)
Top Overlay:
  text "LC_LPF_T_6" at 58.254,56.508 h1.52
  text "LC_LPF_T_11" at 100.219,56.351 h1.52
  text "LC_LPF_T_1" at 15.154,54.908 h1.52
  text "LC_LPF_T_16" at 140.789,54.412 h1.52
  text "LC_LPF_T_7" at 57.287,47.16 h1.52
  text "LC_LPF_T_12" at 99.699,45.507 h1.52
  text "LC_LPF_T_2" at 14.959,44.96 h1.52
  text "LC_LPF_T_17" at 140.789,44.412 h1.52
  text "LC_LPF_T_8" at 58.124,37.005 h1.52
  text "LC_LPF_T_13" at 100.144,35.036 h1.52
  text "LC_LPF_T_3" at 14.947,34.664 h1.52
  text "LC_LPF_T_18" at 140.789,34.412 h1.52
  text "LC_LPF_T_9" at 57.733,26.459 h1.52
  text "LC_LPF_T_4" at 14.822,24.564 h1.52
  text "LC_LPF_T_14" at 100.367,24.564 h1.52
  text "LC_LPF_T_19" at 140.789,24.412 h1.52
  text "LC_LPF_T_10" at 57.566,15.466 h1.52
  text "LC_LPF_T_5" at 14.559,14.46 h1.52
  text "LC_LPF_T_20" at 140.589,12.612 h1.52
  text "LC_LPF_T_15" at 99.847,12.606 h1.52
Mechanical 1:
  lines w0.254: -64,-100 -64,-50 -14,-50 -14,-100 -64,-100 ; 0,0 0,65 180,65 180,0 0,0